# EAGLE board Atmega (EAGLE 6.2)
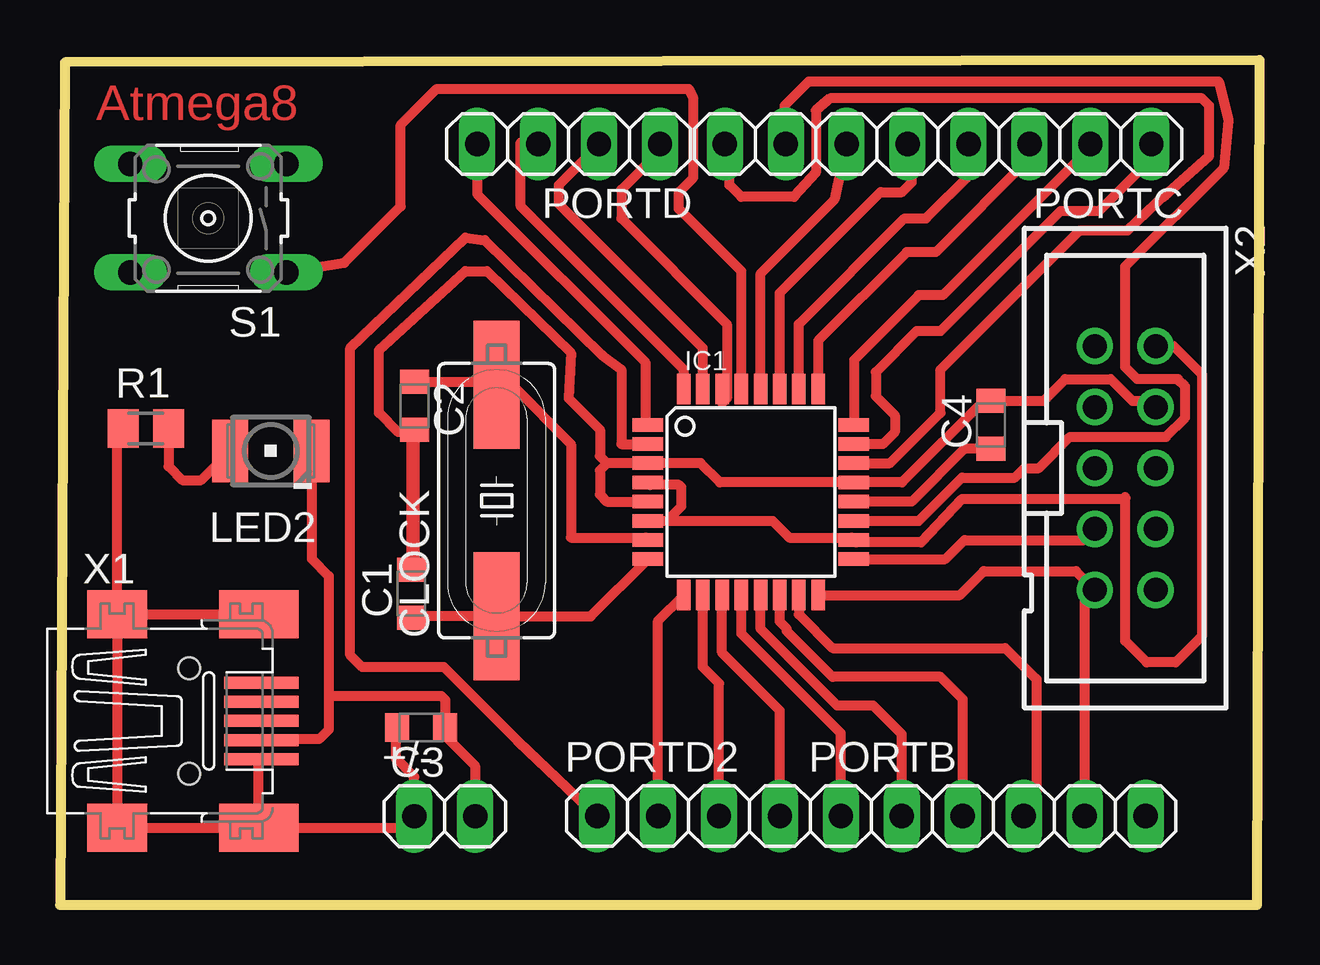
[diagram p0: board, top side]
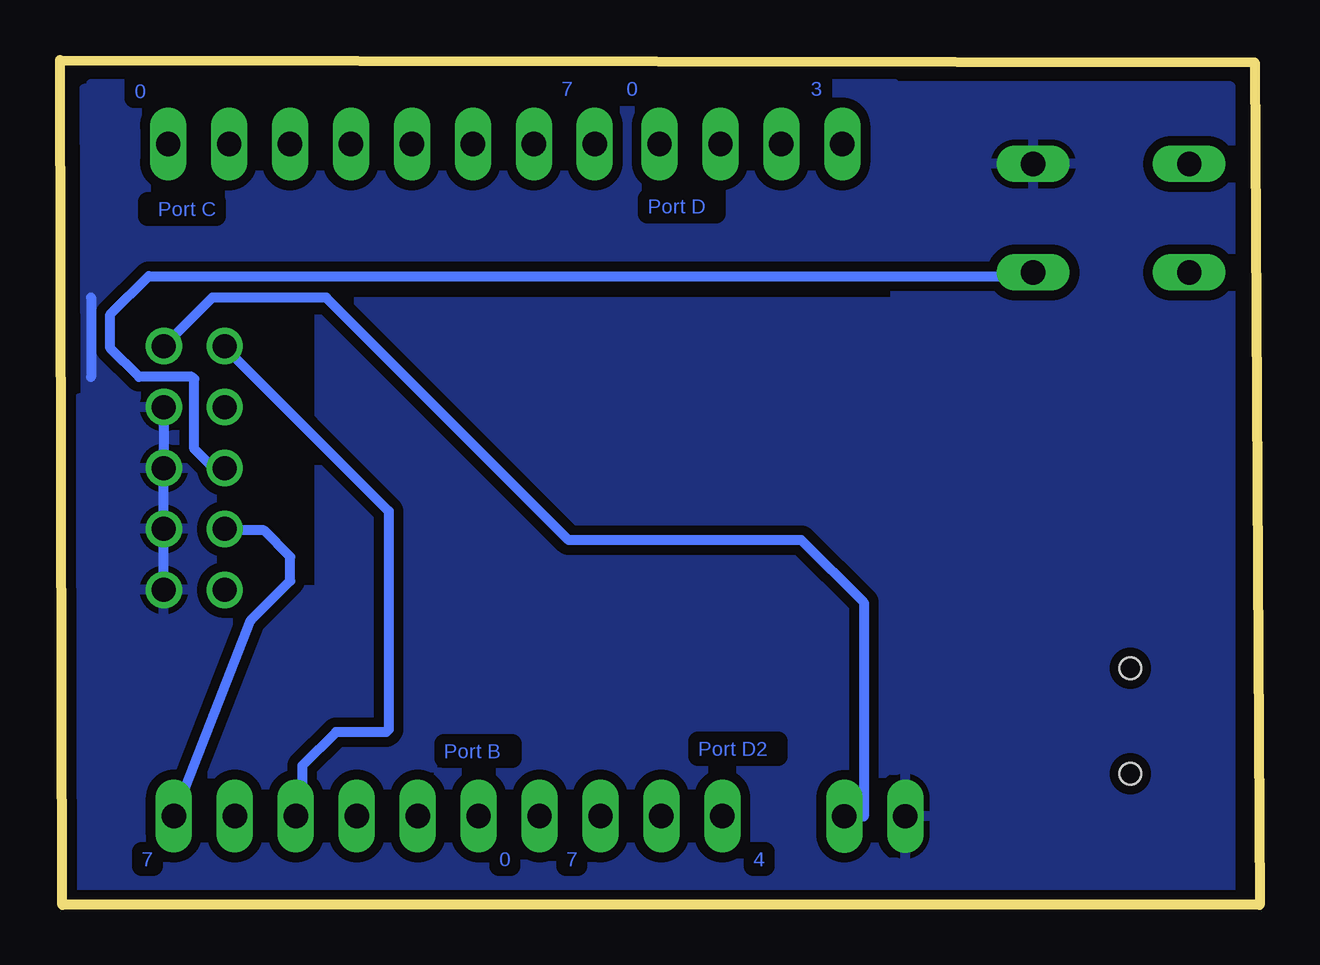
[diagram p1: board, bottom side, seen from below]

Size 50 x 35.2 mm. Coordinates in mm from the lower left corner, seen from the top.
Outline: 16.2,35.1 16,35.1
Outline: 0.2,35.1 0,0 49.9,0 50,35.2 0.2,35.1
Copper layers (1*16): Top 0.035mm / dielectric 1.5mm / Bottom 0.035mm
Design rules: minimum track width 10mil, minimum drill 24mil, track to track 4mil, track to pad 4mil, pad to pad 8mil, via to via 8mil, smd to smd 8mil, copper to edge 10mil, drill to drill 8mil, minimum pad ring 10mil, minimum via ring 8mil, stop-mask expansion 4mil, vias tented up to drill 0mil, thermal gap 10mil

## Footprints (pad centres in the part's own frame; a part is rotated, then mirrored left to right if it is on the bottom)
1X02 = drill 1.016 long: 1 -1.27,0; 2 1.27,0
SMC_Z = smd 1 x 1.2: + -1,0; - 1,0
HC49UP = smd 5.334 x 1.93: 1 -4.826,0; 2 4.826,0
TQFP32-08 = smd 1.27 x 0.559: 1 -4.293,2.8; 2 -4.293,2; 3 -4.293,1.2; 4 -4.293,0.4; 5 -4.293,-0.4; 6 -4.293,-1.2; 7 -4.293,-2; 8 -4.293,-2.8; 17 4.293,-2.8; 18 4.293,-2; 19 4.293,-1.2; 20 4.293,-0.4; 21 4.293,0.4; 22 4.293,1.2; 23 4.293,2; 24 4.293,2.8 | smd 0.559 x 1.27: 9 -2.8,-4.293; 10 -2,-4.293; 11 -1.2,-4.293; 12 -0.4,-4.293; 13 0.4,-4.293; 14 1.2,-4.293; 15 2,-4.293; 16 2.8,-4.293; 25 2.8,4.293; 26 2,4.293; 27 1.2,4.293; 28 0.4,4.293; 29 -0.4,4.293; 30 -1.2,4.293; 31 -2,4.293; 32 -2.8,4.293
PLCC2 = smd 2.6 x 1.5: A 0,1.7; C 0,-1.7
1X06 = drill 1.016 long: 1 -6.35,0; 2 -3.81,0; 3 -1.27,0; 4 1.27,0; 5 3.81,0; 6 6.35,0
1X08 = drill 1.016 long: 1 -8.89,0; 2 -6.35,0; 3 -3.81,0; 4 -1.27,0; 5 1.27,0; 6 3.81,0; 7 6.35,0; 8 8.89,0
1X04 = drill 1.016 long: 1 -3.81,0; 2 -1.27,0; 3 1.27,0; 4 3.81,0
M0805 = smd 1.3 x 1.6: 1 -0.95,0; 2 0.95,0
B3F-10XX = drill 1.016 long: 1 -3.251,2.261; 2 3.251,2.261; 3 -3.251,-2.261; 4 3.251,-2.261
32005-201 = smd 3.1 x 0.5: 1 3,1.6; 2 3,0.8; 3 3,0; 4 3,-0.8; 5 3,-1.6 | smd 2.5 x 2: M1 -3,-4.45; M2 -3,4.45 | smd 3.3 x 2: M3 2.9,4.45; M4 2.9,-4.45 | hole 0.9: 0,2.2; 0,-2.2
PAK100/2500-10 = drill 1 pad 1.422: 1 -5.08,-1.27; 2 -5.08,1.27; 3 -2.54,-1.27; 4 -2.54,1.27; 5 0,-1.27; 6 0,1.27; 7 2.54,-1.27; 8 2.54,1.27; 9 5.08,-1.27; 10 5.08,1.27

## Placement (x,y rotation side)
+/-  [1X02]  16.04,3.69 0 top
C1  18pf  [SMC_Z]  14.65,12.97 90 top
C2  18pf  [SMC_Z]  14.78,20.8 270 top
C3  100nf  [SMC_Z]  15.06,7.39 180 top
C4  0.1µf  [SMC_Z]  38.8,20 90 top
CLOCK  16Mhz  [HC49UP]  18.2,16.84 90 top
IC1  MEGA8-AI  [TQFP32-08]  28.8,17.2 0 top
LED2  Green  [PLCC2]  8.79,18.91 90 top
PORTB  [1X06]  38.9,3.7 0 top
PORTC  [1X08]  36.6,31.7 180 top
PORTD  [1X04]  21.2,31.7 180 top
PORTD2  [1X04]  26.2,3.7 0 top
R1  350ohm  [M0805]  3.58,19.85 0 top
S1  [B3F-10XX]  6.18,28.61 180 top
X1  USB  [32005-201]  5.39,7.66 0 top
X2  2510-  [PAK100/2500-10]  44.4,18.2 270 top

## Library data of the parts
+/- PORTB PORTC PORTD PORTD2 = pinhead
C1-C4 R1 = rcl
CLOCK = crystal; OC_FARNELL: unknown; OC_NEWARK: unknown
IC1 = atmel; MPN: ATMEGA8-16AU; OC_FARNELL: 9171371; OC_NEWARK: 73M8863
LED2 = led; COLOR: green
S1 = switch-omron; MPN: B3F-1000; OC_FARNELL: 176432; OC_NEWARK: 36M3542
X1 = con-cypressindustries; OC_FARNELL: unknown; OC_NEWARK: unknown
X2 = con-3m; MF: 3M; MPN: 2510-6002UB; OC_FARNELL: 9838244; OC_NEWARK: 46F4725

## Nets
GND: +/-.1 C1.- C2.- C3.- C4.- IC1.3 IC1.5 IC1.21 R1.1 S1.3 X1.5 X1.M1 X1.M2 X1.M3 X1.M4 X2.4 X2.6 X2.8 X2.10
N$1: C2.+ CLOCK.2 IC1.7
N$2: IC1.29 S1.1 X2.5
N$3: IC1.30 PORTD.1
N$4: LED2.A R1.2
N$5: IC1.23 PORTC.1
N$6: IC1.24 PORTC.2
N$7: C1.+ CLOCK.1 IC1.8
N$8: IC1.25 PORTC.3
N$9: IC1.26 PORTC.4
N$10: IC1.27 PORTC.5
N$11: IC1.28 PORTC.6
N$12: IC1.19 PORTC.7
N$13: IC1.22 PORTC.8
N$14: IC1.31 PORTD.2
N$15: IC1.32 PORTD.3
N$16: IC1.1 PORTD.4
N$17: IC1.2 PORTD2.1
N$18: IC1.9 PORTD2.2
N$19: IC1.10 PORTD2.3
N$20: IC1.11 PORTD2.4
N$22: IC1.12 PORTB.1
N$23: IC1.13 PORTB.2
N$25: IC1.14 PORTB.3
N$26: IC1.15 PORTB.4 X2.1
N$27: IC1.16 PORTB.5 X2.9
N$28: IC1.17 PORTB.6 X2.7
N$29: C4.+ IC1.20
VCC: +/-.2 C3.+ IC1.4 IC1.6 IC1.18 LED2.C X1.4 X2.2

## Tracks (layer width: path | path; a pad name or v marks a point on that pad's centre or on a via)
GND
  Top 0.406: X1.M4 8.29,5.96 X1.5 | X1.M4 14.29,3.21 +/-.1 14.77,5.33 14,6.1 14,7.33 C3.- | X1.M4 X1.M1 X1.M2 | X1.M2 X1.M3 | X1.M2 2.39,19.61 R1.1 | 22.8,18.4 IC1.3 26.7,18.4 27.5,17.6 IC1.21 35.1,17.6 38.5,21 C4.- 41,21 41.9,21.9 43.8,21.9 44.7,21 45.41,21 X2.4 | 22.8,18.4 22.5,18.1 22.5,17.1 22.8,16.8 IC1.5 | C2.- 14.78,14.1 C1.- | C1.- 14.65,19.65 14.7,19.7 14.1,19.7 13.3,20.5 13.3,23.1 16.9,26.4 17.8,26.4 21.3,23 21.2,21.1 22.5,19.8 22.5,18.7 22.8,18.4 | C1.- 14.65,19.55 14.7,19.6
  Bottom 0.406: X2.10 X2.8 X2.6 X2.4 | 48.7,25.3 48.7,22
  pour Bottom (isolate 0.406): 1.2,34.1 15.2,34.1 15.2,1.1 44.2,1.1 44.2,11.1 46.2,11.1 46.2,21.1 49.2,21.1 49.2,0.1 1.2,0.1
  pour Bottom (isolate 0.406): 15.2,34.2 48.7,34.2 48.7,4.6 15.2,4.6
  pour Bottom (isolate 0.61): 15.3,34 49,34 49,4.7 15.3,4.7
N$1
  Top 0.406: C2.+ 18.77,21.8 CLOCK.2 18.9,21.6 21.3,19.2 21.3,15.3 24.41,15.3 IC1.7
N$2
  Top 0.406: IC1.29 28.4,26.4 25.8,29 25.8,29.7 26.4,30.3 26.4,33.6 26.2,34 15.7,34 14.2,32.5 14.2,29.1 11.85,26.75 S1.1
  Bottom 0.406: X2.5 43.6,18.2 44.4,19 44.4,21.9 44.5,22 46.7,22 47.9,23.2 47.9,24.6 46.3,26.2 9.58,26.2 S1.1
N$3
  Top 0.406: PORTD.1 25.01,31.41 23.4,29.8 23.4,28.6 27.8,24.2 27.8,21.1 27.6,20.9 IC1.30
N$4
  Top 0.406: R1.2 4.53,18.27 5.1,17.7 5.88,17.7 LED2.A
N$5
  Top 0.406: PORTC.1 45.49,31.09 43.3,28.9 41.7,28.9 36.7,23.9 35.7,23.9 34,22.2 34,21.2 34.8,20.4 34.8,19.7 34.3,19.2 IC1.23
N$6
  Top 0.406: PORTC.2 42.95,31.55 36.8,25.4 35.8,25.4 33.1,22.7 IC1.24
N$7
  Top 0.406: IC1.8 22.12,12.01 CLOCK.1 14.69,12.01 C1.+
N$8
  Top 0.406: PORTC.3 40.41,31.11 36.5,27.2 35.3,27.2 31.6,23.5 IC1.25
N$9
  Top 0.406: IC1.26 30.8,24.2 35.2,28.6 36.1,28.6 38,30.5 38,32.27 PORTC.4
N$10
  Top 0.406: IC1.27 30,25.5 34.2,29.7 35.1,29.7 35.5,30.1 35.5,32.23 PORTC.5
N$11
  Top 0.406: IC1.28 29.2,26.3 32.3,29.4 PORTC.6
N$12
  Top 0.406: 30.25,31.15 PORTC.7 30.2,32.05 30.2,33.3 31.2,34.3 48.3,34.3 48.7,32.7 48.5,30.7 44.4,26.6 44.4,22.4 44.9,21.9 46.6,21.9 46.9,21.6 46.9,20.3 46.1,19.5 42.1,19.5 40.8,18.2 40.2,18.2 39.8,17.8 37.6,17.8 35.8,16 IC1.19
N$13
  Top 0.406: IC1.22 34.6,18.4 36.7,20.5 36.7,22.3 42.5,28.1 44.5,28.1 46.1,29.6 46,29.5 47.9,31.2 47.9,33.3 47.6,33.6 32.1,33.6 31.5,33.1 31.5,30.5 30.6,29.5 28.4,29.5 27.9,30 27.9,31.51 PORTC.8
N$14
  Top 0.406: IC1.31 26.8,23.2 20.8,29.2 20.8,30 22.4,31.6 22.4,32.43 PORTD.2
N$15
  Top 0.406: IC1.32 26,22.3 19.2,29.1 19.2,31.77 PORTD.3
N$16
  Top 0.406: PORTD.4 17.39,29.61 24.4,22.6 24.4,20.11 IC1.1
N$17
  Top 0.406: PORTD2.1 19.09,6.81 16,9.9 12.6,9.9 12.1,10.4 12.1,23.2 16.9,27.8 17.7,27.7 22.6,22.9 23.4,22.3 23.4,19.2 IC1.2
N$18
  Top 0.406: PORTD2.2 24.93,11.84 IC1.9
N$19
  Top 0.406: PORTD2.3 27.47,9.23 26.8,9.9 IC1.10
N$20
  Top 0.406: PORTD2.4 30.01,8.09 27.6,10.5 IC1.11
N$21
  pour Bottom (isolate 0.406): 17.2,25.1 39.2,25.1 39.2,1.1 15.2,1.1 15.2,25.1
N$22
  Top 0.406: PORTB.1 32.55,7.15 28.4,11.3 IC1.12
N$23
  Top 0.406: PORTB.2 35.09,7.11 33.9,8.3 32.4,8.3 29.2,11.5 IC1.13
N$24
  pour Bottom (isolate 0.406): 39.2,13.1 45.2,13.1 49.2,9.1 49.2,1.1 39.2,1.1
N$25
  Top 0.406: PORTB.3 37.63,8.57 36.7,9.5 32.2,9.5 30.3,11.4 30.3,11.5 30,11.8 IC1.14
N$26
  Top 0.406: IC1.15 30.8,12.1 32.2,10.7 39.4,10.7 40.7,9.4 40.7,4.23 PORTB.4
  Bottom 0.406: X2.1 43.13,23.23 36.3,16.4 36.3,7.3 36.4,7.2 38.5,7.2 39.9,5.8 39.9,3.97 PORTB.4
N$27
  Top 0.406: IC1.16 37.51,12.91 38.5,13.9 42.35,13.9 X2.9 42.71,12.7 PORTB.5
N$28
  Top 0.406: IC1.17 36.9,14.4 37.7,15.2 42.67,15.2 X2.7
  Bottom 0.406: PORTB.6 42.05,11.85 40.4,13.5 40.4,14.5 41.5,15.6 43.07,15.6 X2.7
N$29
  Top 0.406: C4.+ 37.7,19 35.5,16.8 IC1.20
VCC
  Top 0.406: IC1.4 24.61,17.5 25.8,17.5 25.9,17.4 25.9,16.6 25.3,16 IC1.6 29.7,16 30.4,15.3 32.99,15.3 IC1.18 33.19,15.1 35.9,15.1 37.6,16.9 44.4,16.9 | X2.2 46.42,23.28 47.6,22.1 47.6,11.2 46.5,10.1 45.3,10.1 44.4,11 44.4,16.9 | 44.4,17 44.4,16.9 | LED2.C 10.49,14.41 11.2,13.7 11.2,8.7 | 11.2,8.7 11.2,7.3 10.8,6.9 8.43,6.9 X1.4 | 11.2,8.7 15.9,8.7 16.06,8.54 C3.+ 16.06,7.04 17.3,5.8 +/-.2
  Bottom 0.406: X2.2 43.65,25.3 38.9,25.3 28.8,15.2 19.1,15.2 16.5,12.6 16.5,3.68 +/-.2

## Text on the board
Top: Atmega8
Bottom: 3 | 0 | 7 | 0 | Port D | Port C | Port D2 | Port B | 4 | 7 | 0 | 7